# Altium PCB Science-Rev1.PcbDoc
Units mil, origin at the board's own origin, x right, y up, seen from the top; angles counter-clockwise.
Board outline 3937.01 x 3937.01 mil, 2 copper layers (Top Layer, Bottom Layer); 97 components, 55 nets, 315 pads, 79 vias.
Unrouted connection lines stored in the file: 75.
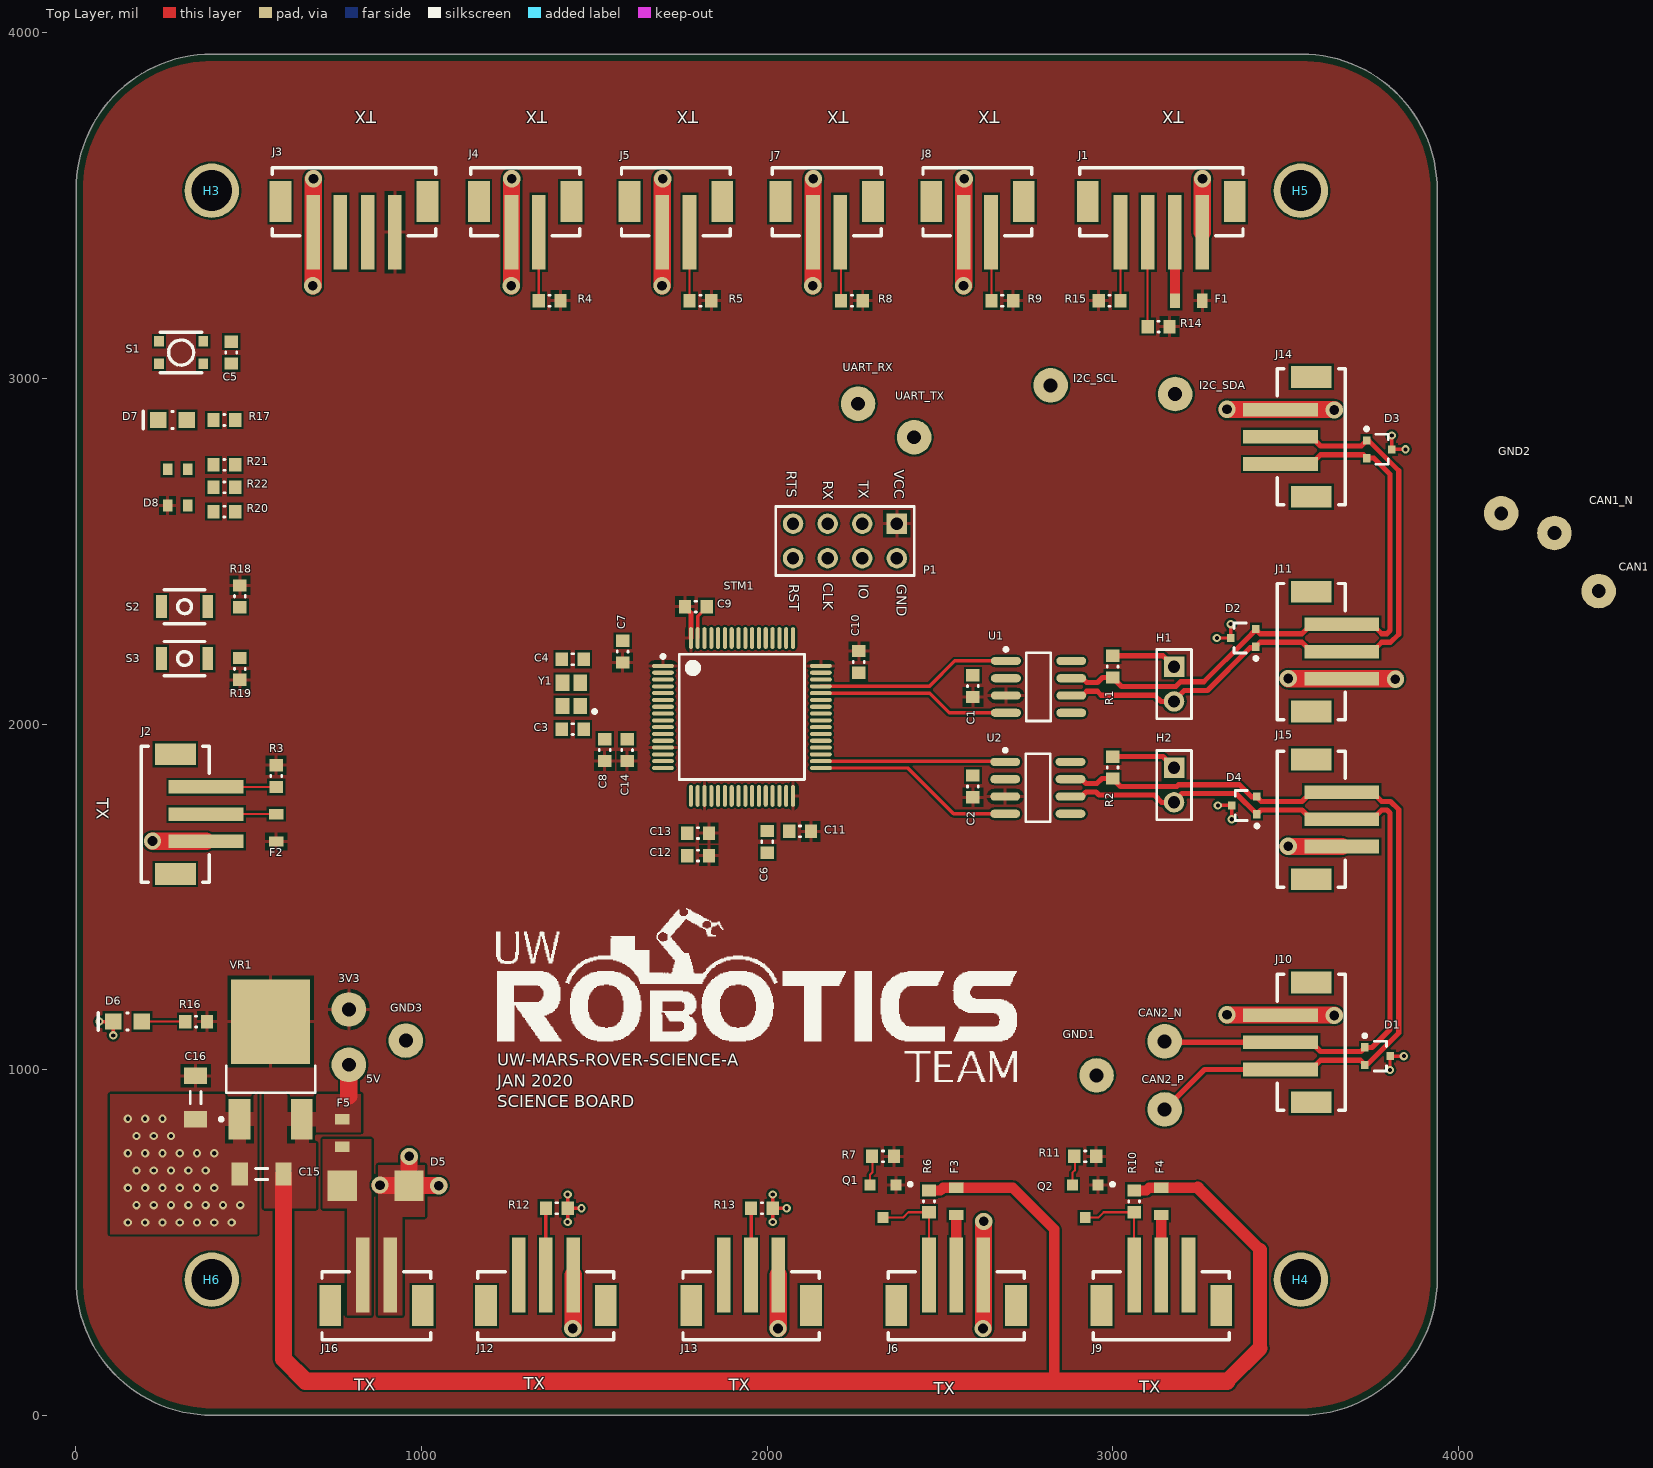
[diagram p0: Top Layer view]
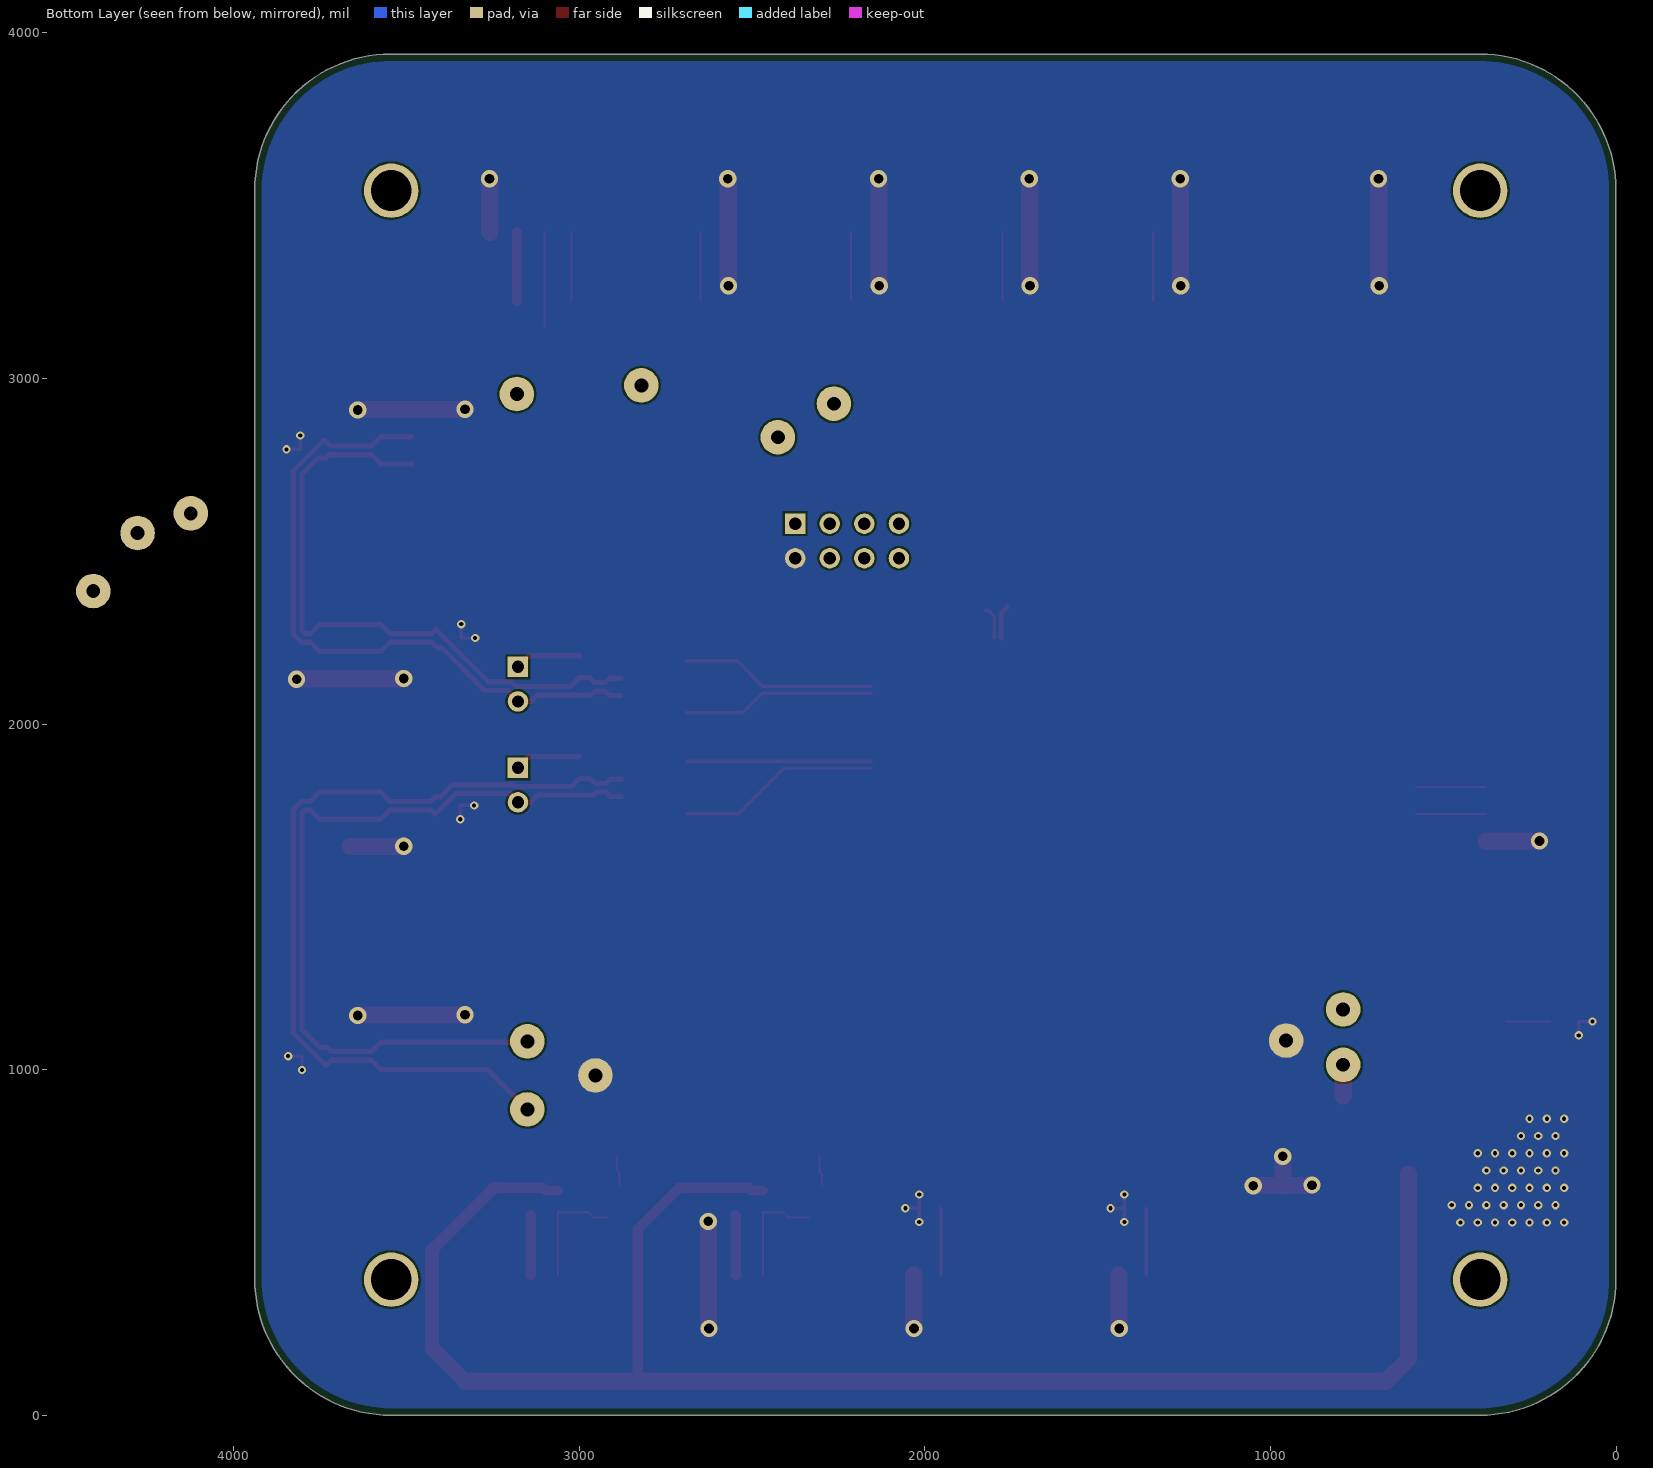
[diagram p1: Bottom Layer view, seen from below]

## Layer stack, top to bottom
Top Solder: solder mask 0.4, Solder Resist, Dk 3.5
Top Layer: signal copper 1.4
Dielectric 1: dielectric 12.6, FR-4, Dk 4.8
Bottom Layer: signal copper 1.4
Bottom Solder: solder mask 0.4, Solder Resist, Dk 3.5

## Board outline
1,395.09 ccw(c394.7,395.09) 394.7,1.39 3544.31,1.39 ccw(c3544.31,395.09) 3938.01,395.09 3938.01,3544.7 ccw(c3544.31,3544.7) 3544.31,3938.4 394.7,3938.4 ccw(c394.7,3544.7) 1,3544.7

## Design rules (kind name [scope] priority, off if disabled: settings)
BoardOutlineClearance [All] p1: gap=20 ignorepadtopadclearanceinfootprint=FALSE
Clearance [All] p1: gap=6 ignorepadtopadclearanceinfootprint=TRUE
DiffPairsRouting [All] p1: maxlimit=10 minlimit=10 mostfreqgap=10 toplayer_minwidth=15 toplayer_maxwidth=15 toplayer_prefwidth=15 bottomlayer_minwidth=15 bottomlayer_maxwidth=15 bottomlayer_prefwidth=15 maxuncoupledlength=500
HoleSize [All] p1: absolutevalues=TRUE maxlimit=120 minlimit=1 maxpercent=80.000 minpercent=20.000
MinimumAnnularRing [All] p1: minimumring=6
MinimumSolderMaskSliver [All] p1: minsoldermaskwidth=6
PolygonConnect "3V3 Thermal Relief" [InNet('+3V3')] p1: connectstyle=Relief reliefconductorwidth=10 reliefentries=4 polygonreliefangle="90 Angle" airgapwidth=10
PolygonConnect "Voltage Regulator Thermal Relief" [InComponent('VR1')] p2: connectstyle=Relief reliefconductorwidth=40 reliefentries=4 polygonreliefangle="90 Angle" airgapwidth=10
PolygonConnect [All] p3: connectstyle=Direct reliefconductorwidth=10 reliefentries=4 polygonreliefangle="90 Angle" airgapwidth=10
RoutingVias [All] p1: holewidth=12 width=24 viastyle="Through Hole" minholewidth=12 minwidth=24 maxholewidth=28 maxwidth=50
SilkToSolderMaskClearance [IsPad] p1: minsilkscreentomaskgap=6 clearancetoexposedcopper=TRUE
SolderMaskExpansion [All] p1: expansion=4
Width [All] p1: maxlimit=50 minlimit=6 preferedwidth=6 minimp=50.000000 maximp=50.000000 favimp=50.000000
26 further rules are at their usual default settings.

## Classes and differential pairs
component class Support: D7 D8 H3 H4 H5 H6 R17 R18 R19 R20 R21 R22 S2 S3
component class POWER: 3V3 5V C15 C16 D5 D6 F5 GND3 J16 R16 VR1
component class MCU: C3 C4 C5 C6 C7 C8 C9 C10 C11 C12 C13 C14 I2C_SCL I2C_SDA P1 R14 R15 S1 STM1 UART_RX UART_TX Y1
component class Connectors: D1 D2 D3 D4 F1 F2 F3 F4 J1 J2 J3 J4 J5 J6 J7 J8 J9 J10 J11 J12 J13 J14 J15 Q1 Q2 R3 R4 R5 R6 R7 R8 R9 R10 R11 R12 R13
component class CAN: C1 C2 CAN1_N CAN1_P CAN2_N CAN2_P GND1 GND2 H1 H2 R1 R2 U1 U2
differential pair CAN2: +CAN2_P -CAN2_N
differential pair CAN1: +CAN1_P -CAN1_N

## Components (designator, comment, footprint, x,y, rotation, side; value= is the part's Value field where it differs from the comment)
3V3 "TESTPOINT_LOOP" TESTPOINT_LOOP 790,1175 r90 top
5V "TESTPOINT_LOOP" TESTPOINT_LOOP 790,1015 r90 top
C1 "CAP_0.1uF_16V_0603" CAPC0603(1608)55_N 2595,2110 r270 top value=0.1uF
C2 "CAP_0.1uF_16V_0603" CAPC0603(1608)55_N 2595,1820 r270 top value=0.1uF
C3 "CAP_15pF_0603" CAPC0603(1608)55_N 1437.71,1985.69 r0 top value=15pF
C4 "CAP_15pF_0603" CAPC0603(1608)55_N 1437.71,2187.69 r180 top value=15pF
C5 "CAP_0.1uF_16V_0603" CAPC0603(1608)55_N 450,3075 r270 top value=0.1uF
C6 "CAP_4.7uF_0603" CAPC0603(1608)55_N 2000,1660 r90 top value=4.7uF
C7 "CAP_0.1uF_16V_0603" CAPC0603(1608)55_N 1582,2210 r270 top value=0.1uF
C8 "CAP_1uF_16V_0603" CAPC0603(1608)55_N 1530,1925 r270 top value=1uF
C9 "CAP_0.1uF_16V_0603" CAPC0603(1608)55_N 1793.5,2340 r180 top value=0.1uF
C10 "CAP_0.1uF_16V_0603" CAPC0603(1608)55_N 2265,2180 r90 top value=0.1uF
C11 "CAP_0.1uF_16V_0603" CAPC0603(1608)55_N 2095,1690 r0 top value=0.1uF
C12 "CAP_4.7uF_0603" CAPC0603(1608)55_N 1800,1620 r0 top value=4.7uF
C13 "CAP_0.1uF_16V_0603" CAPC0603(1608)55_N 1800,1685 r0 top value=0.1uF
C14 "CAP_10nF_0603" CAPC0603(1608)55_N 1595,1925 r270 top value=10nF
C15 "10uF" CAPC1206(3216) 537.99,699 r180 top
C16 "10uF" CAPC1206(3216) 347,919.99 r270 top
CAN1_N "TESTPOINT_LOOP" TESTPOINT_LOOP 4277,2553 r180 top
CAN1_P "TESTPOINT_LOOP" TESTPOINT_LOOP 4405,2385 r180 top
CAN2_N "TESTPOINT_LOOP" TESTPOINT_LOOP 3149.61,1082.68 r180 top
CAN2_P "TESTPOINT_LOOP" TESTPOINT_LOOP 3149.61,885.83 r180 top (schematic designator CAN2_A)
D1 "TVS_DIODE_CAN" NXP-SOT323-3 3765,1040 r0 top
D2 "TVS_DIODE_CAN" NXP-SOT323-3 3377,2249.41 r180 top
D3 "TVS_DIODE_CAN" NXP-SOT323-3 3770,2795 r0 top
D4 "TVS_DIODE_CAN" NXP-SOT323-3 3380,1765 r180 top
D5 "TVS_DIODE_BIDIRECTIONAL" TVS_DIODE_BIDIRECTIONAL 867.54,665 r0 top
D6 "DIO_LED_G" LED_0805_LINE 150,1140 r180 top
D7 "DIO_LED_Y" LED_0805_LINE 280,2880 r180 top
D8 "LED_RGB" LED_RGB 295,2685 r180 top
F1 "FUSE_250mA_0603" FUSE_0603 3218.94,3225 r180 top
F2 "FUSE_250mA_0603" FUSE_0603 580,1700.43 r90 top
F3 "FUSE_1.5A_0603" FUSE_0603 2546.67,620 r270 top
F4 "FUSE_1.5A_0603" FUSE_0603 3140,620 r270 top
F5 "FUSE_2A_0603" FUSE_0603 771,817.43 r90 top
GND1 "GND" TESTPOINT_LOOP 2952.76,984.25 r180 top
GND2 "TESTPOINT_LOOP" TESTPOINT_LOOP 4123,2610 r180 top
GND3 "TESTPOINT_LOOP" TESTPOINT_LOOP 955,1085 r180 top
H1 "JUMPER_2" HDR1X2 3177,2165.97 r270 top
H2 "JUMPER_2" HDR1X2 3177,1873.97 r270 top
H3 "MOUNTING_HOLES" MOUNTING_HOLE 393.7,3543.31 r0 top
H4 "MOUNTING_HOLES" MOUNTING_HOLE 3543.31,393.7 r0 top
H5 "MOUNTING_HOLES" MOUNTING_HOLE 3543.31,3543.31 r0 top
H6 "MOUNTING_HOLES" MOUNTING_HOLE 393.7,393.7 r0 top
I2C_SCL "TESTPOINT_LOOP" TESTPOINT_LOOP 2820,2980 r0 top (schematic designator I2)
I2C_SDA "TESTPOINT_LOOP" TESTPOINT_LOOP 3180,2955 r0 top (schematic designator I1)
J1 "CON_4M_SM4" JST-B4B-SM4-TB 3140,3610 r180 top
J2 "CON_3M_SM4" JST-B3B-SM4-TB 190,1740 r270 top
J3 "CON_4M_SM4" JST-B4B-SM4-TB 805,3610 r180 top
J4 "CON_2M_SM4" JST-B2B-SM4-TB 1300,3610 r180 top
J5 "CON_2M_SM4" JST-B2B-SM4-TB 1736.04,3610 r180 top
J6 "CON_3M_SM4" JST-B3B-SM4-TB 2546.67,220 r0 top
J7 "CON_2M_SM4" JST-B2B-SM4-TB 2172.08,3610 r180 top
J8 "CON_2M_SM4" JST-B2B-SM4-TB 2608.12,3610 r180 top
J9 "CON_3M_SM4" JST-B3B-SM4-TB 3140,220 r0 top
J10 "CON_3M_SM4" JST-B3B-SM4-TB 3672.01,1080 r90 top
J11 "CON_3M_SM4" JST-B3B-SM4-TB 3475,2210 r270 top
J12 "CON_3M_SM4" JST-B3B-SM4-TB 1360,220 r0 top
J13 "CON_3M_SM4" JST-B3B-SM4-TB 1953.33,220 r0 top
J14 "CON_3M_SM4" JST-B3B-SM4-TB 3672.01,2831.26 r90 top
J15 "CON_3M_SM4" JST-B3B-SM4-TB 3475,1725 r270 top
J16 "CON_2M_SM4" JST-B2B-SM4-TB 870,220 r0 top
P1 "HEADER 4X2" HEADER_2X4 2375,2580 r180 top
Q1 "NMOS_20V_6A" NMOS_SOT23-3 2335,620 r180 top
Q2 "NMOS_20V_6A" NMOS_SOT23-3 2920,620 r180 top
R1 "RES_120R_0603" RESC0603(1608)_N 2999,2166.7 r90 top value=120R
R2 "RES_120R_0603" RESC0603(1608)_N 2999,1874.7 r90 top value=120R
R3 "RES_4K7_0603" RESC0603(1608)_N 580,1850 r90 top value=4K7
R4 "RES_10K_0603" RESC0603(1608)_N 1370.87,3225 r0 top value=10K
R5 "RES_10K_0603" RESC0603(1608)_N 1806.91,3225 r0 top value=10K
R6 "RES_10K_0603" RESC0603(1608)_N 2467.93,620 r90 top value=10K
R7 "RES_10K_0603" RESC0603(1608)_N 2335,750 r0 top value=10K
R8 "RES_10K_0603" RESC0603(1608)_N 2245,3225 r0 top value=10K
R9 "RES_10K_0603" RESC0603(1608)_N 2680,3225 r0 top value=10K
R10 "RES_10K_0603" RESC0603(1608)_N 3061.26,620 r90 top value=10K
R11 "RES_10K_0603" RESC0603(1608)_N 2920,750 r0 top value=10K
R12 "RES_10K_0603" RESC0603(1608)_N 1391.5,600 r0 top value=10K
R13 "RES_10K_0603" RESC0603(1608)_N 1984.83,600 r0 top value=10K
R14 "RES_4K7_0603" RESC0603(1608)_N 3132.13,3150 r0 top value=4K7
R15 "RES_4K7_0603" RESC0603(1608)_N 2990.39,3225 r180 top value=4K7
R16 "1.1K 1%" RESC0603(1608)_N 348.5,1140 r0 top value=100R
R17 "RES_100R_0603" RESC0603(1608)_N 430,2880 r180 top value=100R
R18 "RES_10K_0603" RESC0603(1608)_N 475,2370 r270 top value=10K
R19 "RES_10K_0603" RESC0603(1608)_N 475,2160 r270 top value=10K
R20 "RES_100R_0603" RESC0603(1608)_N 430,2615 r0 top value=100R
R21 "RES_100R_0603" RESC0603(1608)_N 430,2750 r180 top value=100R
R22 "RES_100R_0603" RESC0603(1608)_N 430,2685 r0 top value=100R
S1 "SW_PWR" PTS830GM140 305,3075 r0 top
S2 "SW_TACTILE" B3U-1100P 315,2340 r180 top
S3 "SW_TACTILE" B3U-1100P 315,2190 r180 top
STM1 "STM32F446RET6" STM-LQFP64_L 1927,2021 r0 top
U1 "IC TXRX CAN" LT-S8_N 2785,2108 r0 top
U2 "IC TXRX CAN" LT-S8_N 2783,1816 r0 top
UART_RX "TESTPOINT_LOOP" TESTPOINT_LOOP 2263,2927 r90 top
UART_TX "TESTPOINT_LOOP" TESTPOINT_LOOP 2425,2830 r90 top
VR1 "5V0_3V3_LDO" VOLTAGE_REGULATOR 564,967.17 r0 top
Y1 "CRYSTAL_25MHZ" AVX-CX2520DB32000D0GEJZ1-4_V 1433.77,2086.16 r180 top

## Footprints (in the part's own frame and the unit in brackets; to place one, negate y for a bottom-side part, rotate by r counter-clockwise, add the part's x,y. Pads: shape width x height; smd on the part's side, far side on the other; paste and mask are expansions set on the pad)
AVX-CX2520DB32000D0GEJZ1-4_V [mm] "Hand Drawn, 4-Leads,Body 2.5x2mm"
  rect 1x1.2 smd: 1(-0.65,0.85) 2(-0.65,-0.85) 3(0.65,-0.85) 4(0.65,0.85)
  silkscreen extent -1.83,1.13 -1.58,1.38, body extent -1,-1.25 1,1.25, height 0.55
B3U-1100P [mm] "TACTILE SWITCH GREY"
  rect 0.8x1.7 smd: 1(-1.7,0) 2(1.7,0)
  silkscreen extent -1.5,-1.25 1.5,1.25, body extent -2,-1.25 2,1.25, height 1.6
CAPC0603(1608)55_N [mm] "Chip Capacitor, Body 1.6x0.8mm, Height 0.55mm, IPC Medium Density"
  rect 0.9x1 smd: 1(-0.8,0) 2(0.8,0)
  silkscreen extent -0.05,-0.4 0.05,0.4, body extent -0.87,-0.48 0.88,0.47, height 0.55
CAPC1206(3216) [mm] "Chip Capacitor, Body 3.2x1.6mm, Height 0.55mm, IPC Medium Density"
  rect 1.2x1.7 smd: 1(-1.6,0) 2(1.6,0)
  silkscreen extent -0.45,-0.4 0.45,0.4, body extent -1.6,-0.85 1.6,0.85, height 1.75
FUSE_0603 [mm] "Chip Fuse, Body 1.6x0.81mm"
  rect 0.762x1.09 smd: 1(-1.005,0) 2(1.005,0)
  body extent -0.8,-0.38 0.8,0.38, height 0.75
HDR1X2 [mm] "Connector; Header; 2 Position"
  rect 1.5x1.5 hole 0.9: 1(0,0)
  round 1.5 hole 0.9: 2(2.54,0)
  silkscreen extent -1.27,-1.27 3.81,1.27, body extent -1.27,-1.27 3.81,1.27, height 6.35
HEADER_2X4 [mm]
  rect 1.5x1.5 hole 0.9: 1(0,0)
  round 1.5 hole 0.9: 2(2.54,0) 3(5.08,0) 4(7.62,0) 5(0,2.54) 6(2.54,2.54) 7(5.08,2.54) 8(7.62,2.54)
  silkscreen extent -1.27,-1.27 8.89,3.81, body extent -1.36,-1.32 8.8,3.67, height 8.54
JST-B2B-SM4-TB [mm]
  rect 1x5.5 smd: 1(-1,4.75) 2(1,4.75)
  rect 1.6x3 smd: 3(-3.4,2.5) 4(3.4,2.5)
  silkscreen extent -4,0 4,5, body extent -3.97,0 3.97,7, height 6.6
JST-B3B-SM4-TB [mm]
  rect 1x5.5 smd: 1(-2,4.75) 2(0,4.75) 3(2,4.75)
  rect 1.6x3 smd: 4(-4.4,2.5) 5(4.4,2.5)
  silkscreen extent -5,0 5,5, body extent -4.97,0 4.97,7, height 6.6
JST-B4B-SM4-TB [mm]
  rect 1x5.5 smd: 1(-3,4.75) 2(-1,4.75) 3(1,4.75) 4(3,4.75)
  rect 1.6x3 smd: 5(-5.4,2.5) 6(5.4,2.5)
  silkscreen extent -6,0 6,5, body extent -5.98,0 5.98,7, height 6.6
LED_0805_LINE [mm] "SMD, 2-Leads, Body 2x1.25mm"
  rect 1.2x1.2 smd: 1(-1.05,0) 2(1.05,0)
  silkscreen extent -0.05,-0.63 2.16,0.64, body extent -1,-0.63 1,0.63, height 0.8
LED_RGB [mm]
  rect 0.7x0.86 smd: 1(-0.737,-1.325) 2(0.738,-1.325) 3(-0.737,1.325) 4(0.738,1.325)
  body extent -1.4,-1.75 1.4,1.75, height 1.89
LT-S8_N [mm] "SOP, 8-Leads, Body 4.9x3.9mm, Pitch 1.27mm, IPC Medium Density"
  oval 2.2x0.6 smd: 1(-2.4,1.905) 2(-2.4,0.635) 3(-2.4,-0.635) 4(-2.4,-1.905) 5(2.4,-1.905) 6(2.4,-0.635) 7(2.4,0.635) 8(2.4,1.905)
  silkscreen extent -2.52,-2.5 0.9,2.88, body extent -2,-2.5 2,2.5, height 1.76
MOUNTING_HOLE [mm]
  round 4 hole 3 unplated: 0(0,0)
NMOS_SOT23-3 [mm] "SOT23, 3 pins, Body 2.90mm x 2.80mm"
  rect 0.8x0.8 smd: 1(-0.95,-1.2) 2(0.95,-1.2) 3(0,1.2)
  silkscreen extent -2.13,-1.37 -1.88,-1.13, body extent -1.46,-1.25 1.46,1.23, height 1
NXP-SOT323-3 [mm] "SOT23, 3-Leads, Body 2.2x1.35mm, Pitch 0.65mm"
  rect 0.55x0.6 smd paste-1: 1(-0.925,0.65) 2(-0.925,-0.65) 3(0.925,0)
  silkscreen extent -1.05,-1.1 0.67,1.62, body extent -1.15,-1.1 1.15,1.1, height 1.1
PTS830GM140 [mm] "PWR TACTILE SWITCH (RED)"
  rect 0.7x0.75 smd: 1(-1.625,0.825) 2(1.625,0.825) 3(-1.625,-0.825) 4(1.625,-0.825)
  silkscreen extent -1.53,-1.5 1.53,1.5, body extent -1.75,-1.3 1.75,1.3, height 1.35
RESC0603(1608)_N [mm] "Chip Resistor, Body 1.6x0.8mm, IPC Medium Density"
  rect 0.9x1 smd: 1(-0.8,0) 2(0.8,0)
  silkscreen extent -0.05,-0.4 0.05,0.4, body extent -0.85,-0.47 0.85,0.47, height 0.6
STM-LQFP64_L [mm] "QFP, 64-Leads, Body 10x10mm, Pitch 0.5mm, IPC High Density"
  oval 1.6x0.3 smd: 1(-5.8,3.75) 2(-5.8,3.25) 3(-5.8,2.75) 4(-5.8,2.25) 5(-5.8,1.75) 6(-5.8,1.25) 7(-5.8,0.75) 8(-5.8,0.25) 9(-5.8,-0.25) 10(-5.8,-0.75) 11(-5.8,-1.25) 12(-5.8,-1.75) 13(-5.8,-2.25) 14(-5.8,-2.75) 15(-5.8,-3.25) 16(-5.8,-3.75) 33(5.8,-3.75) 34(5.8,-3.25) 35(5.8,-2.75) 36(5.8,-2.25) 37(5.8,-1.75) 38(5.8,-1.25) 39(5.8,-0.75) 40(5.8,-0.25) 41(5.8,0.25) 42(5.8,0.75) 43(5.8,1.25) 44(5.8,1.75) 45(5.8,2.25) 46(5.8,2.75) 47(5.8,3.25) 48(5.8,3.75)
  oval 0.3x1.6 smd: 17(-3.75,-5.8) 18(-3.25,-5.8) 19(-2.75,-5.8) 20(-2.25,-5.8) 21(-1.75,-5.8) 22(-1.25,-5.8) 23(-0.75,-5.8) 24(-0.25,-5.8) 25(0.25,-5.8) 26(0.75,-5.8) 27(1.25,-5.8) 28(1.75,-5.8) 29(2.25,-5.8) 30(2.75,-5.8) 31(3.25,-5.8) 32(3.75,-5.8) 49(3.75,5.8) 50(3.25,5.8) 51(2.75,5.8) 52(2.25,5.8) 53(1.75,5.8) 54(1.25,5.8) 55(0.75,5.8) 56(0.25,5.8) 57(-0.25,5.8) 58(-0.75,5.8) 59(-1.25,5.8) 60(-1.75,5.8) 61(-2.25,5.8) 62(-2.75,5.8) 63(-3.25,5.8) 64(-3.75,5.8)
  silkscreen extent -5.92,-4.6 4.6,4.6, body extent -5,-5 5,5, height 1.6
TESTPOINT_LOOP [mm]
  round 2.54 hole 1.02: 1(0,0)
  body extent -1.27,-1.27 1.27,1.27, height 4.57
TVS_DIODE_BIDIRECTIONAL [mm]
  rect 2.16x2.26 smd: 1(-2.45,0) 2(2.45,0)
  body extent -2.7,-1.8 2.7,1.8, height 2.27
VOLTAGE_REGULATOR [mm] "DPAK, 3-Leads, Body 6.095x6.54mm, Pitch 4.57mm"
  rect 1.6x3 smd: 1(-2.285,-2.79) 3(2.285,-2.79)
  rect 5.8x6.2 smd: 2(0,4.39)
  silkscreen extent -3.76,-2.91 3.27,1.14, body extent -3.27,-0.84 3.27,5.25, height 2.38

## Part data
3V3 5V CAN1_N CAN1_P CAN2_N CAN2_P GND2 GND3 I2C_SCL I2C_SDA UART_RX UART_TX: "Loop testpoint through-hole pad", Manufacturer="Keystone Electronics", Manufacturer Part Number 1=5002, Supplier Part Number 1=36-5002-ND, Supplier 1=Digi-Key
C1 C2 C5 C7 C9 C10 C11 C13: "CAP CER 0.1UF 16V X7R 0603", Manufacturer=Yageo, MPN=CC0603KRX7R7BB104, Package="0603 (1608 Metric)", Supplier Part Number 1=311-1088-1-ND, Temperature Coefficient=X7R, Voltage Rating=16V, Dimensions="0.063\" L x 0.031\" W (1.60mm x 0.80mm)", Supplier 1=Digi-Key
C3 C4: "CAP CER 15PF 250V NPO 0603", Manufacturer=Yageo, MPN=AC0603JRNPOYBN150, Package="0603 (1608 Metric)", Supplier Part Number 1=311-3282-1-ND, Temperature Coefficient=NP0, Voltage Rating=250V, Dimensions="0.063\" L x 0.031\" W (1.60mm x 0.80mm)", Supplier 1=Digi-Key
C6 C12: "CAP CER 4.7UF 6.3V X5R 0603", Manufacturer=Yageo, MPN=CC0603KRX5R5BB475, Package="0603 (1608 Metric)", Supplier Part Number 1=311-1521-1-ND, Temperature Coefficient=X5R, Voltage Rating=6.3V, Dimensions="0.063\" L x 0.031\" W (1.60mm x 0.80mm)", Supplier 1=Digi-Key
C8: "CAP CER 1UF 16V Y5V 0603", Manufacturer=Yageo, MPN=CC0603ZRY5V7BB105, Package="0603 (1608 Metric)", Supplier Part Number 1=311-1372-1-ND, Temperature Coefficient=Y5V, Voltage Rating=16V, Dimensions="0.063\" L x 0.031\" W (1.60mm x 0.80mm)", Supplier 1=Digi-Key
C14: "CAP CER 10000PF 16V X7R 0603", Manufacturer=Yageo, MPN=CC0603KRX7R7BB103, Package="0603 (1608 Metric)", Supplier Part Number 1=311-3369-1-ND, Temperature Coefficient=X7R, Voltage Rating=16V, Dimensions="0.063\" L x 0.031\" W (1.60mm x 0.80mm)", Supplier 1=Digi-Key
C15 C16: library part CAP_10uF_50V_1206, "CAP CER 10UF 50V X5R 1206", Manufacturer=Murata, MPN=GRT31CR61H106KE01L, Package="1206 (3216 Metric)", Supplier Part Number 1=490-12456-1-ND, Voltage Rating=50V, Dimensions="0.126\" L x 0.063\" W (3.20mm x 1.6mm)", Supplier 1=Digi-Key
D1 D2 D3 D4: "TVS DIODE 24V 41V SOT323-3", Manufacturer="Nexperia USA Inc.", Manufacturer Part Number=PESD2CAN,215, Package="SC-70, SOT-323", Supplier Part Number 1=1727-3891-1-ND, ComponentLink1Description=Datasheet, ComponentLink1URL=https://assets.nexperia.com/documents/data-sheet/PESD1CAN-U.pdf, Supplier 1=Digi-Key
D5: "TVS DIODE 5V 9.2V DO214AA", Breakdown Voltage=6.4V, Case/Package=SMB, Clamping Voltage=9.2V, Leakage Current=1.6mA, Manufacturer="Nexperia USA Inc.", Manufacturer 1=Littelfuse, Manufacturer Part Number 1=SMBJ5.0CA, Max Breakdown Voltage=7V, Max Operating Temperature=150∑C, Max Power Dissipation=5W, Max Surge Current=65.3A, Min Operating Temperature=-65∑C, MPN=PESD2CAN,215, Operating Supply Voltage=5V, Package="SC-70, SOT-323", Package Quantity=3000, Peak Pulse Power=600W, Power Line Protection=No, Supplier Part Number 1=1727-3891-1-ND, Test Current=10mA, ComponentLink1Description=Datasheet, ComponentLink1URL=https://www.littelfuse.com/~/media/electronics/datasheets/tvs_diodes/littelfuse_tvs_diode_smbj_datasheet.pdf.pdf, Composition=Zener, Direction=Bidirectional, Element Configuration=Single, ESD Protection=Yes, Height=0.096inch, Lead Free="Lead Free", Length=0.179inch, Max Reverse Leakage Current=1.6mA, Min Breakdown Voltage=6.4V, Mount="Surface Mount", Number of Bidirectional Channels=1, Number of Channels=1, Number of Elements=1, Number of Pins=2, Packaging="Tape and Reel", Peak Pulse Current=65.3A, Polarity=Bidirectional, Power Dissipation=600W, Pricing 1="1=0.39000, 10=0.31300, 25=0.28640, 100=0.17980, 250=0.17784, 500=0.16650, 1000=0.11322 (USD)", Radiation Hardening=No, REACH SVHC="No SVHC", Reverse Breakdown Voltage=6.4V, Reverse Standoff Voltage=5V, Stock 1=23233, Supplier 1=Digi-Key, Termination=SMD/SMT, Voltage Rating (DC)=5V, Width=0.155inch
D6: "LED GREEN DIFFUSED 0805 SMD", Forward Voltage Drop=2.2V, Manufacturer=OSRAM, MPN="LG R971-KN-1", Package="0805 (2012 Metric)", Supplier Part Number 1=475-1410-1-ND, Supplier 1=Digi-Key
D7: "LED YELLOW DIFFUSED 0805 SMD", Forward Voltage Drop=2.2V, Manufacturer=OSRAM, MPN="LY R976-PS-36", Package="0805 (2012 Metric)", Supplier Part Number 1=475-2560-1-ND, Supplier 1=Digi-Key
D8: "LED RGB DIFFUSED 4PLCC SMD", Case/Package=PLCC, Color=Blue,Green,Red, Forward Voltage=3.1V, Lens Color=White, Manufacturer 1=Broadcom, Manufacturer Part Number 1=ASMB-MTB1-0A3A2, Supplier Part Number 1=516-3280-1-ND, Test Current=20mA, ComponentLink1Description=http://www.farnell.com/datasheets/2111106.pdf?src-supplier=Farnell, ComponentLink1URL=http://www.farnell.com/datasheets/2111106.pdf?src-supplier=Farnell, ComponentLink2Description=https://docs.broadcom.com/docs/AV02-4194EN?src-supplier=Digi-Key, ComponentLink2URL=https://docs.broadcom.com/docs/AV02-4194EN?src-supplier=Digi-Key, ComponentLink3Description=http://www.farnell.com/datasheets/1801564.pdf?src-supplier=Element14, ComponentLink3URL=http://www.farnell.com/datasheets/1801564.pdf?src-supplier=Element14, ComponentLink4Description=http://www.farnell.com/datasheets/2111106.pdf?src-supplier=Newark, ComponentLink4URL=http://www.farnell.com/datasheets/2111106.pdf?src-supplier=Newark, Dominant Wavelength=470nm, Height=1.9mm, Length=3.2mm, Lens Style=Round, Lens Transparency=Diffused, Luminous Intensity=350mcd, Mount="Surface Mount", Number of Pins=4, Packaging="Cut Tape", Pricing 1="1=0.60000, 10=0.47100, 100=0.30210, 500=0.25980, 1000=0.20059 (USD)", REACH SVHC="No SVHC", RoHS=Yes, Stock 1=142531, Supplier 1=Digi-Key, Viewing Angle=115∑, Width=2.8mm
F1 F2: "FUSE SMD 250mA 32V", Current Rating=250mA, Supplier Part Number 1=F6020CT-ND, Voltage Rating (AC)=32V, ComponentLink1Description=https://datasheet.ciiva.com/303/467-303396.pdf?src-supplier=Digi-Key, ComponentLink1URL=https://datasheet.ciiva.com/303/467-303396.pdf?src-supplier=Digi-Key, ComponentLink2Description=https://datasheet.ciiva.com/18652/littelfuse-fuse-467-datasheet-pdf-18652490.pdf?src-supplier=Digi-Key, ComponentLink2URL=https://datasheet.ciiva.com/18652/littelfuse-fuse-467-datasheet-pdf-18652490.pdf?src-supplier=Digi-Key, ComponentLink3Description=https://datasheet.ciiva.com/18652/littelfuse-fuse-467-datasheet-pdf-18652491.pdf?src-supplier=Digi-Key, ComponentLink3URL=https://datasheet.ciiva.com/18652/littelfuse-fuse-467-datasheet-pdf-18652491.pdf?src-supplier=Digi-Key, ComponentLink4Description=https://datasheet.ciiva.com/18652/littelfuse-fuse-467-datasheet-pdf-18652492.pdf?src-supplier=Digi-Key, ComponentLink4URL=https://datasheet.ciiva.com/18652/littelfuse-fuse-467-datasheet-pdf-18652492.pdf?src-supplier=Digi-Key, Mount="Surface Mount", Supplier 1=Digi-Key, Supplier Packaging 1="Cut Tape", Voltage Rating (DC)=32V
F3 F4: "FUSE SMD 1.5A 32V", Current Rating=1.5A, Supplier Part Number 1=F5702CT-ND, Voltage Rating (AC)=32V, ComponentLink1Description=https://datasheet.ciiva.com/26890/getdatasheetpartid-721713-26890390.pdf?src-supplier=Verical, ComponentLink1URL=https://datasheet.ciiva.com/26890/getdatasheetpartid-721713-26890390.pdf?src-supplier=Verical, ComponentLink2Description=https://datasheet.ciiva.com/7464/467-7464069.pdf?src-supplier=Digi-Key, ComponentLink2URL=https://datasheet.ciiva.com/7464/467-7464069.pdf?src-supplier=Digi-Key, ComponentLink3Description=https://datasheet.ciiva.com/7464/467-7464072.pdf?src-supplier=Digi-Key, ComponentLink3URL=https://datasheet.ciiva.com/7464/467-7464072.pdf?src-supplier=Digi-Key, Mount="Surface Mount", Supplier 1=Digi-Key, Supplier Packaging 1="Cut Tape", Voltage Rating (DC)=32V
F5: "FUSE SMD 2A 32V", Current Rating=2A, Supplier Part Number 1=F7132CT-ND, Voltage Rating (AC)=32V, ComponentLink1Description=https://datasheet.ciiva.com/303/467-303400.pdf?src-supplier=Digi-Key, ComponentLink1URL=https://datasheet.ciiva.com/303/467-303400.pdf?src-supplier=Digi-Key, ComponentLink2Description=http://datasheet.octopart.com/0467002.NRHF-Littelfuse-datasheet-32023482.pdf?src-supplier=Future+Electronics, ComponentLink2URL=http://datasheet.octopart.com/0467002.NRHF-Littelfuse-datasheet-32023482.pdf?src-supplier=Future+Electronics, ComponentLink3Description=http://datasheet.octopart.com/0467002.NRHF-Littelfuse-datasheet-136509808.pdf?src-supplier=Future+Electronics, ComponentLink3URL=http://datasheet.octopart.com/0467002.NRHF-Littelfuse-datasheet-136509808.pdf?src-supplier=Future+Electronics, Mount="Surface Mount", Supplier 1=Digi-Key, Supplier Packaging 1="Cut Tape", Voltage Rating (DC)=32V
GND1: library part TESTPOINT_LOOP, "Loop testpoint through-hole pad", Manufacturer="Keystone Electronics", Manufacturer Part Number 1=5002, Supplier Part Number 1=36-5002-ND, Supplier 1=Digi-Key
H1 H2: "HEADER 2X1"
H3 H4 H5 H6: "6cm x 6cm"
J1 J3: Manufacturer=JST, Manufacturer Part Number=B4B-PH-SM4-TB(LF)(SN), Max Current Rating=2A, Max Voltage Rating=100V, Supplier Part Number 1=455-1736-1-ND, ComponentLink1Description=https://datasheet.ciiva.com/8052/1699381-8052048.pdf?src-supplier=Element14, ComponentLink1URL=https://datasheet.ciiva.com/8052/1699381-8052048.pdf?src-supplier=Element14, ComponentLink2Description=https://datasheet.ciiva.com/11747/0900766b80ddea81-11747504.pdf?src-supplier=RSComponents, ComponentLink2URL=https://datasheet.ciiva.com/11747/0900766b80ddea81-11747504.pdf?src-supplier=RSComponents, ComponentLink3Description=https://datasheet.ciiva.com/6747/80567-6747409.pdf?src-supplier=Newark, ComponentLink3URL=https://datasheet.ciiva.com/6747/80567-6747409.pdf?src-supplier=Newark, ComponentLink4Description=https://datasheet.ciiva.com/727/eph-727525.pdf?src-supplier=Digi-Key, ComponentLink4URL=https://datasheet.ciiva.com/727/eph-727525.pdf?src-supplier=Digi-Key, ComponentLink5Description=https://datasheet.ciiva.com/712/eph-712582.pdf?src-supplier=Digi-Key, ComponentLink5URL=https://datasheet.ciiva.com/712/eph-712582.pdf?src-supplier=Digi-Key, ComponentLink6Description=https://datasheet.ciiva.com/712/eph-712583.pdf?src-supplier=Digi-Key, ComponentLink6URL=https://datasheet.ciiva.com/712/eph-712583.pdf?src-supplier=Digi-Key, Pitch=2mm, Supplier 1=Digi-Key
J2 J6 J9 J10 J11 J12 J13 J14 J15: Manufacturer=JST, Manufacturer Part Number=B3B-PH-SM4-TB(LF)(SN), Max Current Rating=2A, Max Voltage Rating=100V, Supplier Part Number 1=455-1735-1-ND, ComponentLink1Description=https://datasheet.ciiva.com/11747/0900766b80ddea81-11747684.pdf?src-supplier=RSComponents, ComponentLink1URL=https://datasheet.ciiva.com/11747/0900766b80ddea81-11747684.pdf?src-supplier=RSComponents, Pitch=2mm, Supplier 1=Digi-Key
J4 J5 J7 J8 J16: Manufacturer=JST, Manufacturer Part Number=B2B-PH-SM4-TB(LF)(SN), Max Current Rating=2A, Max Voltage Rating=100V, Supplier Part Number 1=455-1734-1-ND, ComponentLink1Description=https://datasheet.ciiva.com/11748/0900766b80ddea81-11748001.pdf?src-supplier=RSComponents, ComponentLink1URL=https://datasheet.ciiva.com/11748/0900766b80ddea81-11748001.pdf?src-supplier=RSComponents, ComponentLink2Description=https://datasheet.ciiva.com/16216/b2b-ph-sm4-tblfsn-16216102.pdf?src-supplier=Future+Electronics, ComponentLink2URL=https://datasheet.ciiva.com/16216/b2b-ph-sm4-tblfsn-16216102.pdf?src-supplier=Future+Electronics, ComponentLink3Description=https://datasheet.ciiva.com/8052/80567-8052023.pdf?src-supplier=Element14, ComponentLink3URL=https://datasheet.ciiva.com/8052/80567-8052023.pdf?src-supplier=Element14, ComponentLink4Description=https://datasheet.ciiva.com/712/eph-712504.pdf?src-supplier=Digi-Key, ComponentLink4URL=https://datasheet.ciiva.com/712/eph-712504.pdf?src-supplier=Digi-Key, ComponentLink5Description=https://datasheet.ciiva.com/712/eph-712505.pdf?src-supplier=Digi-Key, ComponentLink5URL=https://datasheet.ciiva.com/712/eph-712505.pdf?src-supplier=Digi-Key, ComponentLink6Description=https://datasheet.ciiva.com/712/eph-712506.pdf?src-supplier=Digi-Key, ComponentLink6URL=https://datasheet.ciiva.com/712/eph-712506.pdf?src-supplier=Digi-Key, Pitch=2mm, Supplier 1=Digi-Key
P1: "Header, 4-Pin Dual row", Manufacturer="Sullins Connector Solutions", MPN=GRPB042VWVN-RC, Supplier Part Number 1=S9015E-04-ND, Supplier 1=Digi-Key
Q1 Q2: "MOSFET N-CH 20V 6A SOT23", Manufacturer="Alpha & Omega", MPN=AO3420, Package="TO-236-3, SC-59, SOT-23-3", Supplier Part Number 1=785-1014-1-ND, ComponentLink1Description=Datasheet, ComponentLink1URL=http://aosmd.com/res/data_sheets/AO3420.pdf, Supplier 1=Digi-Key
R1 R2: "RES SMD 120 OHM 5% 1/10W 0603", Manufacturer=Yageo, MPN=RC0603JR-07120RL, Package="0603 (1608 Metric)", Supplier Part Number 1=311-120GRCT-ND, Tolerance=5%, Dimensions="0.063\" L x 0.031\" W (1.60mm x 0.80mm)", Supplier 1=Digi-Key
R3 R14 R15: "RES SMD 4.7K OHM 5% 1/10W 0603", Manufacturer=Yageo, MPN=RC0603JR-074K7L, Package="0603 (1608 Metric)", Supplier Part Number 1=311-4.7KGRCT-ND, Tolerance=5%, Dimensions="0.063\" L x 0.031\" W (1.60mm x 0.80mm)", Supplier 1=Digi-Key
R4 R5 R6 R7 R8 R9 R10 R11 R12 R13 R18 R19: "RES SMD 10K OHM 5% 1/10W 0603", Manufacturer=Yageo, MPN=RC0603JR-0710KL, Package="0603 (1608 Metric)", Supplier Part Number 1=311-10KGRCT-ND, Tolerance=5%, Dimensions="0.063\" L x 0.031\" W (1.60mm x 0.80mm)", Supplier 1=Digi-Key
R16: library part RES_1K1_0603, "RES SMD 1.1K OHM 1% 1/10W 0603", Manufacturer=Yageo, MPN=RC0603FR-071K1L, Package="0603 (1608 Metric)", Supplier Part Number 1=311-1.10KHRCT-ND, Tolerance=1%, Dimensions="0.063\" L x 0.031\" W (1.60mm x 0.80mm)", Supplier 1=Digi-Key
R17 R20 R21 R22: "RES SMD 100 OHM 1% 1/10W 0603", Manufacturer=Yageo, MPN=RC0603FR-07100RL, Package="0603 (1608 Metric)", Supplier Part Number 1=311-100HRCT-ND, Tolerance=1%, Dimensions="0.063\" L x 0.031\" W (1.60mm x 0.80mm)", Supplier 1=Digi-Key
S1: "Power Switch (Red)", Manufacturer=C&K, MPN="PTS830GM140 SMTR LFS", Supplier Part Number 1=CKN10587CT-ND, ComponentLink1Description=Datasheet, ComponentLink1URL=https://www.ckswitches.com/media/1478/pts830.pdf, Supplier 1=Digi-Key
S2 S3: "Tactile Switch (Grey)", Manufacturer="Omron Electronics Inc-EMC Div", MPN=B3U-1100P, Supplier Part Number 1=SW1021TR-ND, Supplier 1=Digi-Key
STM1: library part MCU_STM32F446RET6, "ARM Cortex-M4 32-bit MCU+FPU, 512 KB Flash, 128 KB Internal RAM, 50 I/Os, 64-Pin LQFP, -40 to 85 degC, Tray", I/Os (High Current)=50, Operating Frequency(F) (Processor speed) (MHz)=180, Package Description=LQFP64, Package Reference="64-Pin Low-profile Quad Flat Package, Body 10 x 10 mm, Pitch 0.5 mm", Supply Voltage(Vcc) min (V)=1.7, ComponentLink1Description="Manufacturer URL", ComponentLink1URL=http://www.st.com/, ComponentLink2Description=Datasheet, ComponentLink2URL=http://www.st.com/st-web-ui/static/active/en/resource/technical/document/datasheet/DM00141306.pdf, Core="ARM Cortex-M4", D/A Converter=2, DatasheetVersion="Rev. 6", FLASH Size (Prog) (kB)=512, Internal RAM Size (kB)=128, Mounting Technology="Surface Mount", Packing=Tray
U1 U2: library part LTC2875, "IC TXRX CAN 4MBPS 8SO", Manufacturer="Linear Technologies", MPN=LTC2875IS8#PBF, Package="8-SOIC (0.154\", 3.90mm Width)", Supplier Part Number 1=LTC2875IS8#PBF-ND, ComponentLink1Description=Datasheet, ComponentLink1URL=https://www.analog.com/media/en/technical-documentation/data-sheets/2875f.pdf, Supplier 1=Digi-Key
VR1: "IC REG LINEAR 3.3V 1A DPAK", Current Output=1A, Manufacturer="ON Semiconductor", MPN=NCP1117DT33T5G, Supplier Part Number 1=NCP1117DT33T5GOSCT-ND, Supplier 1=Digi-Key
Y1: "CRYSTAL 25.0000MHZ 12PF SMD", Case/Package=SMD/SMT, ESR (Equivalent Series Resistance)=80R, Frequency=25MHz, Frequency Stability=15ppm, Frequency Tolerance=10ppm, Load Capacitance=12pF, Manufacturer 1="Kyocera AVX", Manufacturer Part Number 1=CX2520DB25000H0FLJC1, Max Operating Temperature=85∑C, Min Operating Temperature=-30∑C, Ratings=AEC-Q200, Supplier Part Number 1=1253-1724-1-ND, ComponentLink1Description=https://media.digikey.com/pdf/Data%20Sheets/AVX%20PDFs/CX2520DB_USY1M-H1-16429-00_Spec.pdf?src-supplier=Digi-Key, ComponentLink1URL=https://media.digikey.com/pdf/Data%20Sheets/AVX%20PDFs/CX2520DB_USY1M-H1-16429-00_Spec.pdf?src-supplier=Digi-Key, Height=0.022inch, Length=0.098inch, Mount="Surface Mount", Packaging="Tape and Reel", Pricing 1="1=0.72000, 10=0.63300, 50=0.59120, 100=0.52250, 500=0.49500, 1000=0.41250 (USD)", RoHS=Yes, Stock 1=11741, Supplier 1=Digi-Key, Width=0.079inch

## Via types
v1: diameter 24, hole 12, Top Layer to Bottom Layer, 53 vias
v2: diameter 50, hole 28, Top Layer to Bottom Layer, 26 vias

## Nets (pads, with @x,y where several pads share a name; then routed paths per layer and width w, separated by ;. In a path a pad name is that pad's centre, name@x,y a point inside that pad or via, vN(x,y) a via of type N, cw(c..) or ccw(c..) an arc to the next point about the centre after c; other vN are vias at no path point)
+3V3: 3V3.1 C1.2 C2.2 C7.2 C8.2 C9.2 C10.2 C11.2 C12.2 C13.2 C14.2 C16.1 D8.4 F1.1 F2.1 J3.1 P1.1 Q1.1 Q2.1 R3.2 R4.2 R5.2 R7.2 R8.2 R9.2 R11.2 R14.2 R15.2 R16.2 R18.1 R19.2 STM1.1 STM1.13 STM1.19 STM1.32 STM1.48 STM1.64 U1.3 U2.3 VR1.2 | length 97.8
  Top Layer w15: C9.2 1762.01,2338.03 1779.36,2320.68 STM1.64
+5V: 5V.1 C15.1 F3.1 F4.1 F5.2 R6.2 R10.2 VR1.3 | length 5096.3
  Top Layer w30: R6.2 2501.5,651.5 2509.57,659.57 F3.1 2710.43,659.57 2830,540 2830,100 ; R10.2 3096.5,651.5 3104.57,659.57 F4.1 3245.43,659.57
  Top Layer w35: 3245.43,659.57 3425,480
  Top Layer w40: 3425,195 3425,480
  Top Layer w45: 3330,100 3425,195
  Top Layer w50: C15.1 600.98,164.02 665,100 2830,100 3330,100 ; 790,925 5V.1
\R\S\T\: C5.2 P1.8 S1.4 STM1.7
BUTTON_1: R18.2 S2.1 STM1.26
BUTTON_2: R19.1 S3.1 STM1.27
CAN1_N: CAN1_N.1 D2.1 D3.1 H1.2 J11.2 J14.2 U1.6 | length 1938.1
  Top Layer w15: U1.6 2911.58,2083 2924.08,2095.5 2954.5,2095.5 2966,2084 3121,2084 3139.03,2065.97 H1.2 3177,2068.77 3206.18,2097.94 3273.3,2097.94 3396.26,2220.91 3410.51,2220.91 D2.1 3413.42,2224.8 3425.52,2236.91 3546.52,2236.91 3573.43,2210 J11.2 3750.6,2210 3777.47,2236.87 3803.14,2236.87 3826.57,2260.3 3826.57,2733.12 3740.08,2819.61 D3.1@3733.58,2819.61 ; J14.2 3573.59,2831.26 3600.45,2804.39 3718.37,2804.39 D3.1@3733.58,2819.61 ; D3.1 D3.1@3733.58,2819.61
CAN1_P: CAN1_P.1 D2.2 D3.2 J11.1 J14.1 R1.1 U1.7 | length 1848.5
  Top Layer w15: U1.7 2911.58,2133 2924.08,2120.5 2955.5,2120.5 2970.2,2135.2 R1.1 3025.2,2109 3181.88,2109 3195.82,2122.94 3262.94,2122.94 3385.91,2245.91 3413.72,2273.72 3425.52,2261.91 3546.59,2261.91 3573.43,2288.74 J11.1 3750.6,2288.74 3777.47,2261.87 3792.78,2261.87 3801.57,2270.66 3801.57,2722.77 3754.28,2770.05 3734.22,2770.05 D3.2 3733.58,2770.39 3724.59,2779.39 3600.45,2779.39 3573.59,2752.52 J14.1 ; D2.2@3413.42,2274.02 D2.2
CAN1_RX: STM1.44 U1.4 | length 558.7
  Top Layer w10: STM1.44 2470.1,2089.9 2527,2033 U1.4
CAN1_TX: STM1.45 U1.1 | length 565.6
  Top Layer w10: STM1.45 2469.58,2109.58 2543,2183 U1.1
CAN2_N: CAN2_N.1 D1.1 D4.1 H2.2 J10.2 J15.2 U2.6 | length 2327.4
  Top Layer w15: U2.6 2909.58,1791 2922.08,1803.5 2951.5,1803.5 2960,1795 3120,1795 3141.03,1773.97 H2.2 3177,1776.77 3200.23,1800 3355.83,1800 D4.1 ; CAN2_N.1 3152.28,1080 J10.2 3573.59,1080 3600.45,1053.13 3717.11,1053.13 3728.58,1064.61 D1.1 3729.22,1064.95 3749.28,1064.95 3801.57,1117.23 3801.57,1743.08 3792.78,1751.87 3777.47,1751.87 3750.6,1725 J15.2 3573.43,1725 3546.56,1751.87 3427.89,1751.87 D4.1@3416.42,1740.39
CAN2_P: CAN2_P.1 D1.2 D4.2 J10.1 J15.1 R2.1 U2.7 | length 2451.1
  Top Layer w15: U2.7 2909.58,1841 2922.08,1828.5 2953.5,1828.5 2968.2,1843.2 R2.1 3022.2,1820 3184.88,1820 3189.88,1825 3366.18,1825 3401.23,1789.95 3415.78,1789.95 D4.2 3416.42,1789.61 3429.15,1776.87 3546.56,1776.87 3573.43,1803.74 J15.1 3750.6,1803.74 3777.47,1776.87 3803.14,1776.87 3826.57,1753.44 3826.57,1106.88 3734.1,1014.41 D1.2 ; CAN2_P.1 3265.04,1001.26 J10.1 3573.59,1001.26 3600.45,1028.13 3715.85,1028.13 D1.2@3728.58,1015.39
CAN2_RX: STM1.33 U2.4 | length 588
  Top Layer w10: STM1.33 2406.64,1873.36 2539,1741 U2.4
CAN2_TX: STM1.34 U2.1 | length 534
  Top Layer w10: STM1.34 2686.46,1893.05 U2.1
DC1_ENC_CHANNEL_A: J3.2 STM1.58
DC1_ENC_CHANNEL_B: J3.3 STM1.59
DIR_DC1: J12.1 STM1.21
DIR_DC2: J13.1 STM1.24
GND: C1.1 C2.1 C3.1 C4.1 C5.1 C6.1 C7.1 C8.1 C9.1 C10.1 C11.1 C12.1 C13.1 C14.1 C15.2 C16.2 D1.3 D2.3 D3.3 D4.3 D5.2 D6.2 D7.2 GND1.1 GND2.1 GND3.1 J1.1 J2.3 J3.4 J4.2 J5.2 J6.3 J7.2 J8.2 J9.3 J10.3 J11.3 J12.3 J13.3 J14.3 J15.3 J16.2 P1.5 R12.2 R13.2 S1.1 S2.2 S3.2 STM1.12 STM1.18 STM1.31 STM1.47 STM1.63 U1.2 U1.8 U2.2 U2.8 VR1.1 Y1.2 | length 4556.1
  Top Layer w10: v1(68.66,1140) D6.2 v1(108.66,1100) ; v1(1422.99,560) R12.2 ; v1(1422.99,640) R12.2 ; v1(1462.99,600) R12.2 ; STM1.63 1799.39,2249.69 1799.39,2312.43 1816.97,2330 C9.1@1825,2330 ; v1(2016.33,560) R13.2 ; v1(2016.33,640) R13.2 ; v1(2056.33,600) R13.2 ; v1(3300.58,2249.41) D2.3 v1(3340.58,2289.41) ; v1(3303.58,1765) D4.3 v1(3343.58,1725) ; v1(3801.42,1000) D1.3 v1(3841.42,1040) ; v1(3806.42,2835) D3.3 v1(3846.42,2795)
  Top Layer w50: v2@222.01,1661.26 J2.3 ; v2@686.89,3267.99 J3.4 v2@686.89,3577.99 ; v2@880,666 D5.2@964,666 ; D5.2 D5.2@964,666 ; v2@964,750 D5.2@964,666 ; v2@1050,666 D5.2@964,666 ; v2@1260.63,3267.99 J4.2 v2@1260.63,3577.99 ; v2@1438.74,252.01 J12.3 ; v2@1696.67,3267.99 J5.2 v2@1696.67,3577.99 ; v2@2032.07,252.01 J13.3 ; v2@2132.71,3267.99 J7.2 v2@2132.71,3577.99 ; v2@2568.75,3267.99 J8.2 v2@2568.75,3577.99 ; v2@2625.41,252.01 J6.3 v2@2625.41,562.01 ; J1.1 v2@3258.11,3577.99 ; v2@3330,1158.74 J10.3 v2@3640,1158.74 ; v2@3330,2910 J14.3 v2@3640,2910 ; v2@3507.01,1646.26 J15.3 ; v2@3507.01,2131.26 J11.3 v2@3817.01,2131.26
  other v1: 151,559 201,559 251,559 301,559 351,559 401,559 451,559 176,609 226,609 276,609 326,609 376,609 426,609 476,609 151,659 201,659 251,659 301,659 351,659 401,659 176,709 226,709 276,709 326,709 376,709 151,759 201,759 251,759 301,759 351,759 401,759 176,809 226,809 276,809 151,859 201,859 251,859
  other v2: 1437.74,252.01 2031.07,252.01 2624.41,252.01 2626.41,562.01 1050,665 880,667 965,750 3640,1157.74 3330,1159.74 3507.01,1647.26 222.01,1662.26 3817.01,2130.26 3507.01,2132.26 3640,2909 3330,2911 685.89,3267.99 1259.63,3267.99 1695.67,3267.99 2131.71,3267.99 2567.75,3267.99 687.89,3577.99 1261.63,3577.99 1697.67,3577.99 2133.71,3577.99 2569.75,3577.99 3259.11,3577.99
I2C_SCL: I2C_SCL.1 J1.4 R15.1 STM1.41 | length 198
  Top Layer w6: R15.1 J1.4
I2C_SDA: I2C_SDA.1 J1.3 R14.1 STM1.40 | length 273
  Top Layer w6: R14.1 J1.3
LED_1: R17.1 STM1.8
LED_B: R20.2 STM1.11
LED_G: R22.2 STM1.10
LED_R: R21.1 STM1.9
LIM_SW1: J4.1 R4.1 STM1.56 | length 198
  Top Layer w6: R4.1 J4.1
LIM_SW2: J5.1 R5.1 STM1.55 | length 198
  Top Layer w6: R5.1 J5.1
LIM_SW3: J7.1 R8.1 STM1.54 | length 198.8
  Top Layer w6: J7.1 2213.5,3420.94 R8.1
LIM_SW4: J8.1 R9.1 STM1.53 | length 198.4
  Top Layer w6: J8.1 2648.5,3421.98 R9.1
NetC3_2: C3.2 STM1.6 Y1.1
NetC4_2: C4.2 STM1.5 Y1.3
NetC6_2: C6.2 STM1.30
NetD5_1: D5.1 F5.1 J16.1
NetD6_1: D6.1 R16.1 | length 125.7
  Top Layer w6: D6.1 R16.1
NetD7_1: D7.1 R17.2
NetD8_1: D8.1 R21.2
NetD8_2: D8.2 R22.1
NetD8_3: D8.3 R20.1
NetF1_2: F1.2 J1.2 | length 198
  Top Layer w30: F1.2 J1.2
NetF2_2: F2.2 J2.2 | length 203
  Top Layer w6: J2.2 F2.2
NetF3_2: F3.2 J6.2 | length 173.4
  Top Layer w30: J6.2 F3.2
NetF4_2: F4.2 J9.2 | length 173.4
  Top Layer w30: J9.2 F4.2
NetH1_1: H1.1 R1.2 | length 191.3
  Top Layer w15: R1.2 3144.78,2198.19 H1.1
NetH2_1: H2.1 R2.2 | length 191.3
  Top Layer w15: R2.2 3144.78,1906.19 H2.1
PWM_DC1: J12.2 R12.1 STM1.22 | length 193
  Top Layer w10: J12.2 R12.1
PWM_DC2: J13.2 R13.1 STM1.23 | length 193
  Top Layer w10: J13.2 R13.1
PWM_SV1: Q1.2 R7.1 STM1.28 | length 86.4
  Top Layer w6: Q1.2 2297.6,697.6 2305,705 2305,748.5 R7.1
PWM_SV2: Q2.2 R11.1 STM1.29 | length 86.4
  Top Layer w6: Q2.2 2882.6,702.6 2890,710 2890,748.5 R11.1
SV1_PWM_5V: J6.1 Q1.3 R6.1 | length 320.9
  Top Layer w6: Q1.3 2392.76,572.76 2408.5,588.5 R6.1 J6.1
SV2_PWM_5V: J9.1 Q2.3 R10.1 | length 329.3
  Top Layer w6: Q2.3 2957.76,572.76 2973.5,588.5 R10.1 J9.1
SWD_CLK: P1.7 STM1.49
SWD_IO: P1.6 STM1.46
TEMP_SENSOR: J2.1 R3.1 STM1.14 | length 203.1
  Top Layer w6: J2.1 579.76,1818.74 R3.1
UART_RTS: P1.4 STM1.50
UART_RX: P1.3 STM1.52 UART_RX.1
UART_TX: P1.2 STM1.51 UART_TX.1
pads on no net: H3.0 H4.0 H5.0 H6.0 J1.5 J1.6 J2.4 J2.5 J3.5 J3.6 J4.3 J4.4 J5.3 J5.4 J6.4 J6.5 J7.3 J7.4 J8.3 J8.4 J9.4 J9.5 J10.4 J10.5 J11.4 J11.5 J12.4 J12.5 J13.4 J13.5 J14.4 J14.5 J15.4 J15.5 J16.3 J16.4 S1.2 S1.3 STM1.2 STM1.3 STM1.4 STM1.15 STM1.16 STM1.17 STM1.20 STM1.25 STM1.35 STM1.36 STM1.37 STM1.38 STM1.39 STM1.42 STM1.43 STM1.57 STM1.60 STM1.61 STM1.62 U1.5 U2.5 Y1.4

## Polygon pours and split planes (outlines as drawn)
+3V3 on Top Layer "Top Layer-No Net 1" (solid, pour order 24): 6,4002.21 3943.01,4002.21 3943.01,-33.22 6,-33.22
GND on Top Layer "Top Layer-No Net 3" (solid, pour order 10): 875,290 875,725 1010,725 1010,575 945,575 945,290
+5V on Top Layer "Top Layer-No Net 4" (solid, pour order 20): 545,600 695,600 695,820 825,820 825,930 545,930
NetD5_1 on Top Layer "Top Layer-NetD5_1" (solid, pour order 16): 715,800 715,600 785,600 785,290 855,290 855,800
GND on Top Layer "Top Layer-No Net 5" (solid, pour order 18): 405,930 100,930 100,525 525,525 525,930
no net on Top Layer "Top Layer-No Net" (solid, pour order 26): 394.7,254.28
no net on Top Layer "Top Layer-No Net 2" (solid, pour order 22): 1,3896.01
GND on Bottom Layer "Bottom Layer-No Net 2" (solid, pour order 30): 1,3994.43 1,-41 3938.01,-41 3938.01,3994.43
no net on Bottom Layer "Bottom Layer-No Net" (solid, pour order 38): 1,3502.31
no net on Bottom Layer "Bottom Layer-No Net 1" (solid, pour order 36): 99.43,3797.58

## Silkscreen, mask and mechanical layers (free items; w line width, h text height)
Top Overlay:
  drawing of 16 lines, arcs and shapes, not listed
  text "TX" at 869.5,3785 h60 r180
  text "TX" at 1364.5,3785 h60 r180
  text "TX" at 1800.54,3785 h60 r180
  text "TX" at 2236.58,3785 h60 r180
  text "TX" at 2672.62,3785 h60 r180
  text "TX" at 3204.5,3785 h60 r180
  text "TX" at 50,1786 h60 r270
  text "UW-MARS-ROVER-SCIENCE-A / JAN 2020 / SCIENCE BOARD" at 1220,880 h60
  text "TX" at 1295.5,65 h60
  text "TX" at 805.5,60 h60
  text "TX" at 1888.83,60 h60
  text "TX" at 3075.5,55 h60
  text "TX" at 2482.17,50 h60
Mechanical 1:
  lines w0.5: 3938.01,395.09 cw(c3544.31,395.09) 3544.31,1.39 394.7,1.39 cw(c394.7,395.09) 1,395.09 1,3544.7 cw(c394.7,3544.7) 394.7,3938.4 3544.31,3938.4 cw(c3544.31,3544.7) 3938.01,3544.7 ; 3938.01,400.09 3938.01,3549.7

## Text inside footprints (layer, text, board x,y; h text height)
P1: Top Overlay "TX" at 2264.76,2704.09 h30 r270; Top Overlay "RX" at 2162.4,2704.09 h30 r270; Top Overlay "RTS" at 2056.1,2732.72 h30 r270; Top Overlay "IO" at 2264.76,2404.96 h30 r270; Top Overlay "CLK" at 2162.4,2408.9 h30 r270; Top Overlay "RST" at 2063.19,2404.96 h30 r270; Top Overlay "VCC" at 2367.13,2735.67 h30 r270; Top Overlay "GND" at 2375,2405 h30 r270